# Altium PCB Zoom Camrea Controller V3.0.PcbDoc
Units mil, origin at the board's own origin, x right, y up, seen from the top; angles counter-clockwise.
Board outline 1500 x 1500 mil, 2 copper layers (Top Layer, Bottom Layer); 20 components, 31 nets, 121 pads, 44 vias.
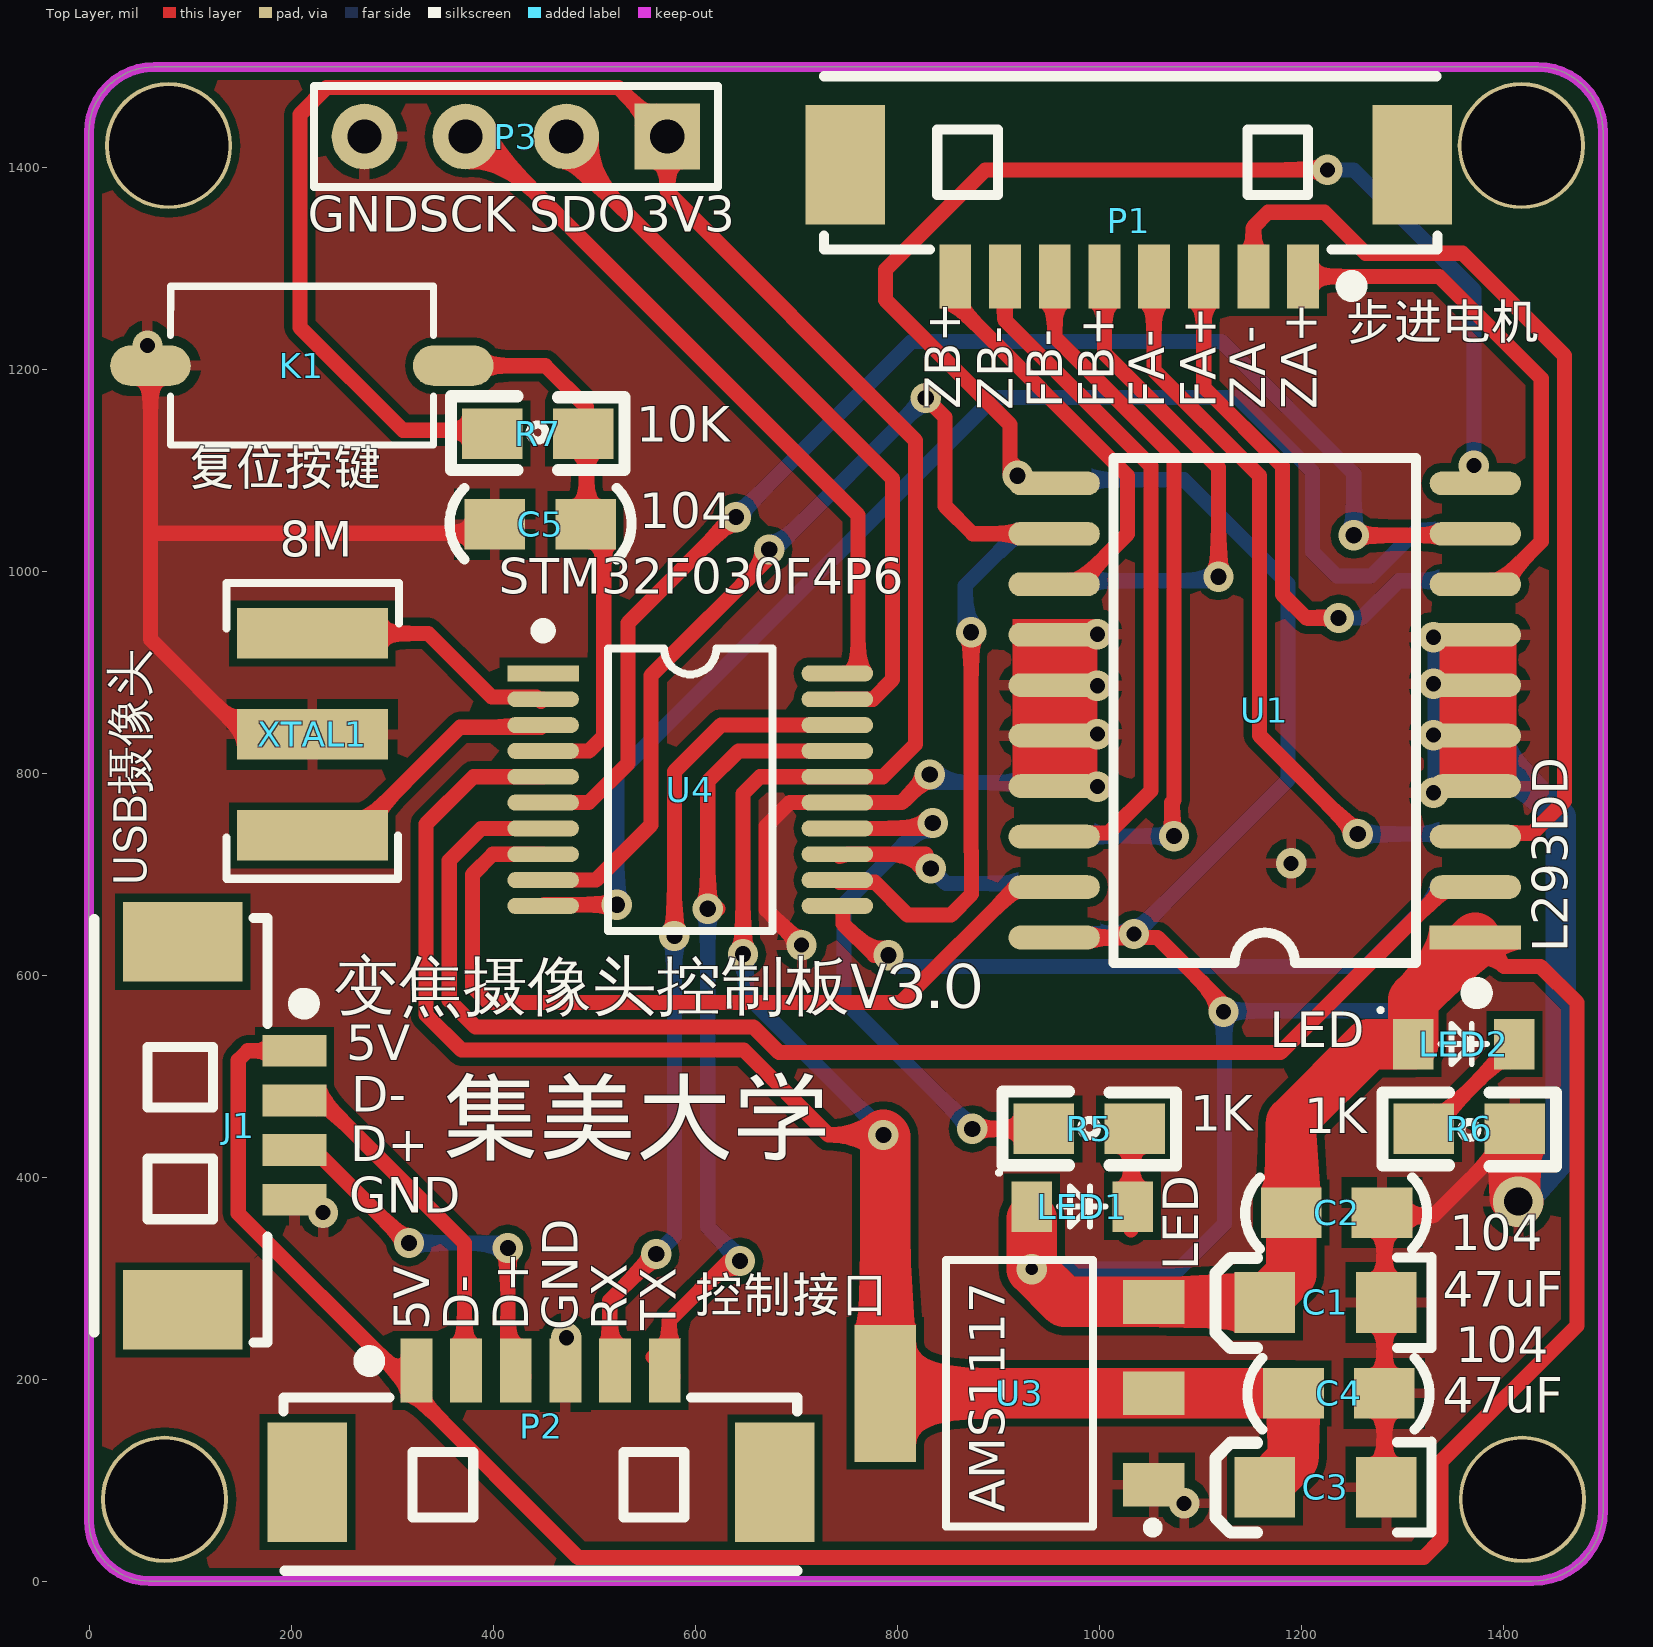
[diagram p0: Top Layer view]
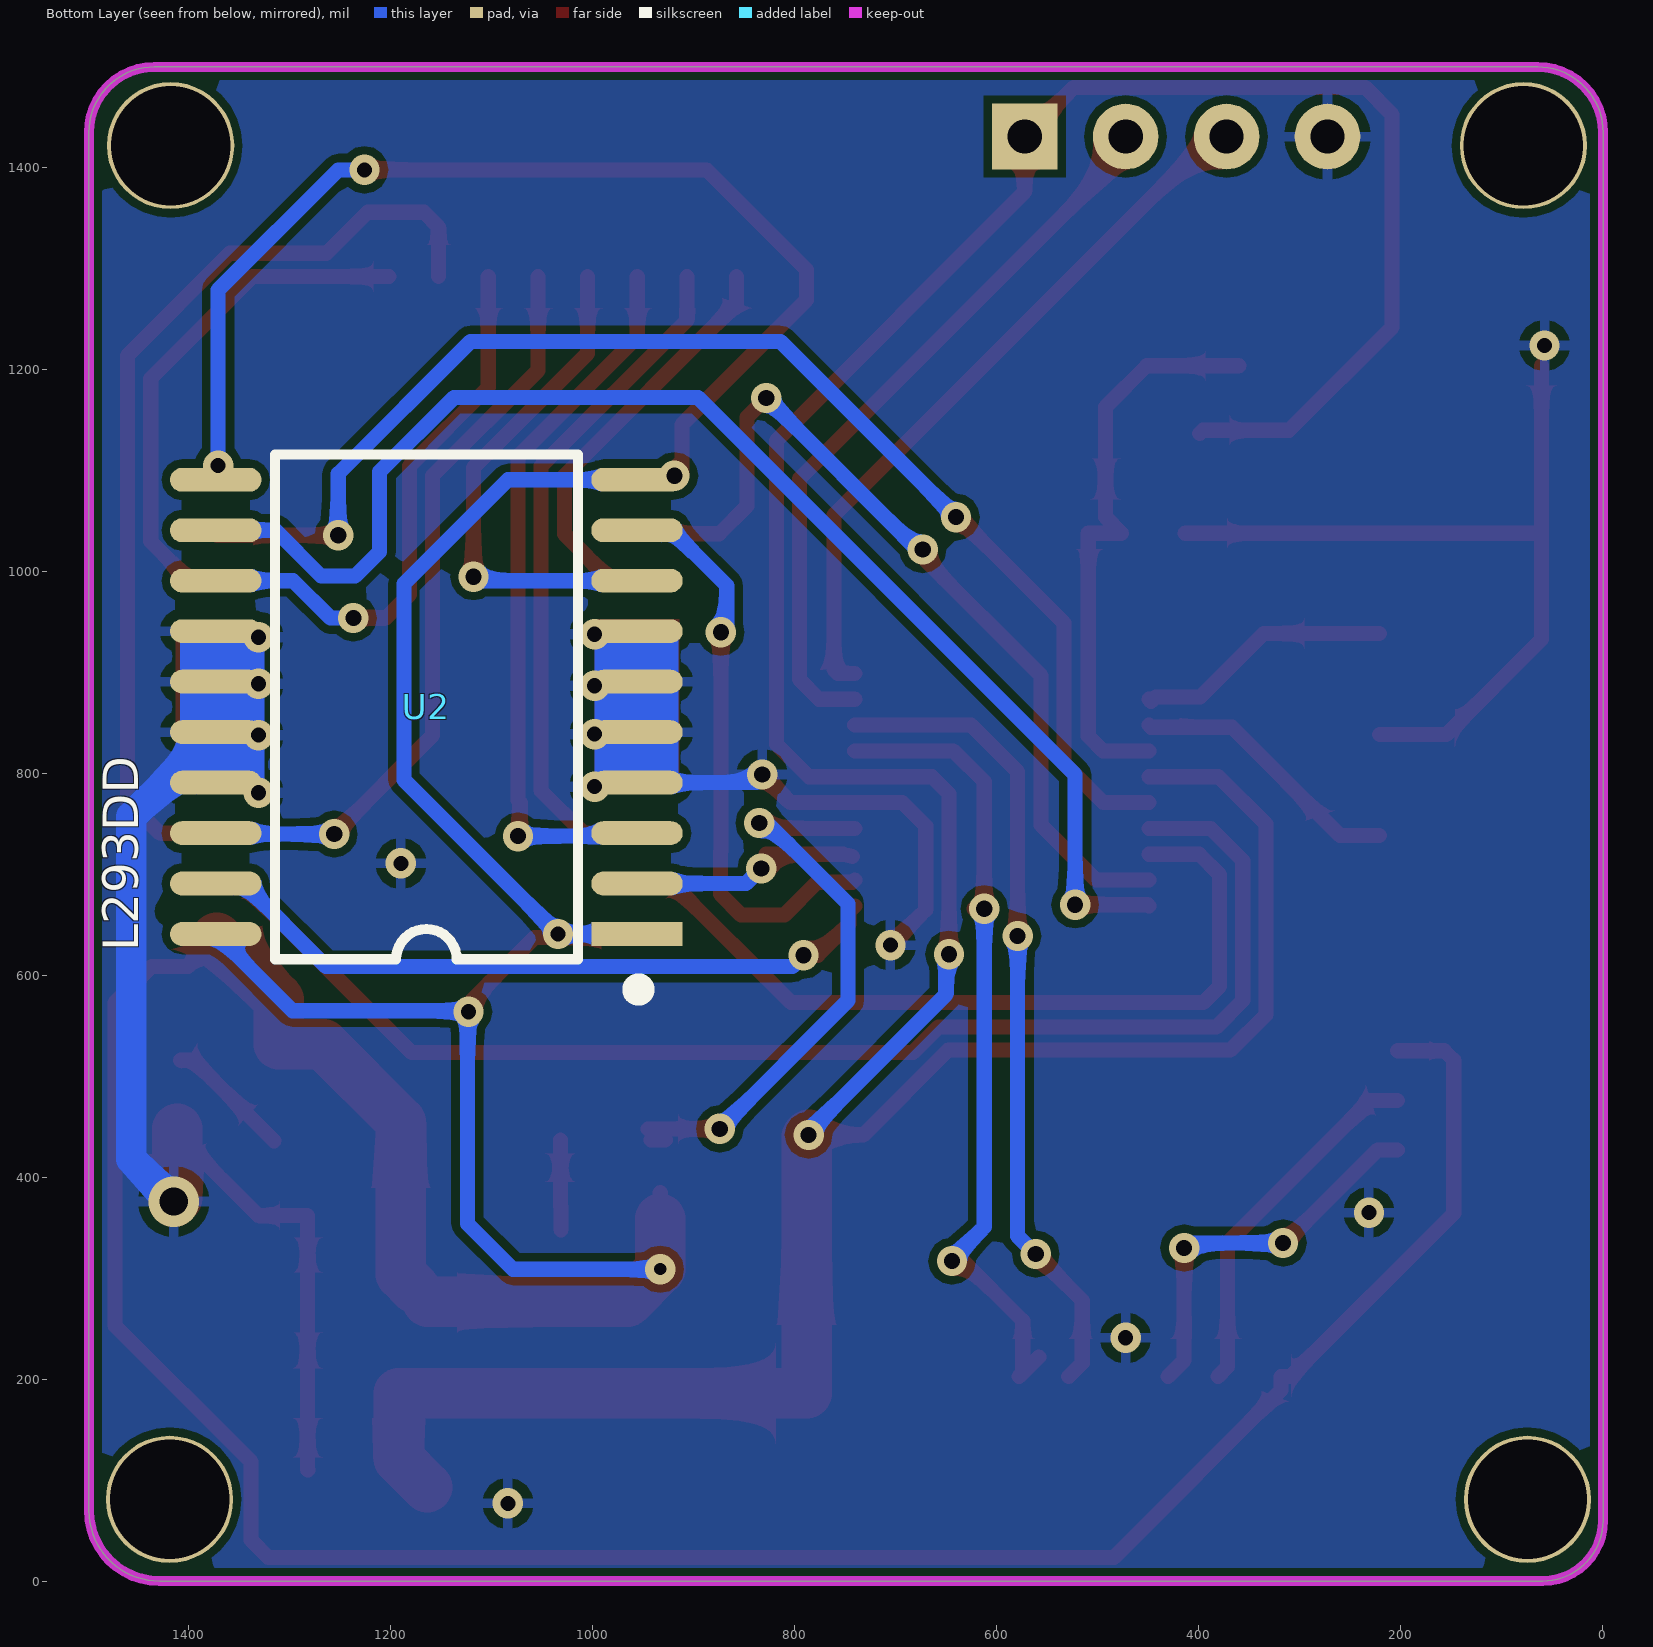
[diagram p1: Bottom Layer view, seen from below]
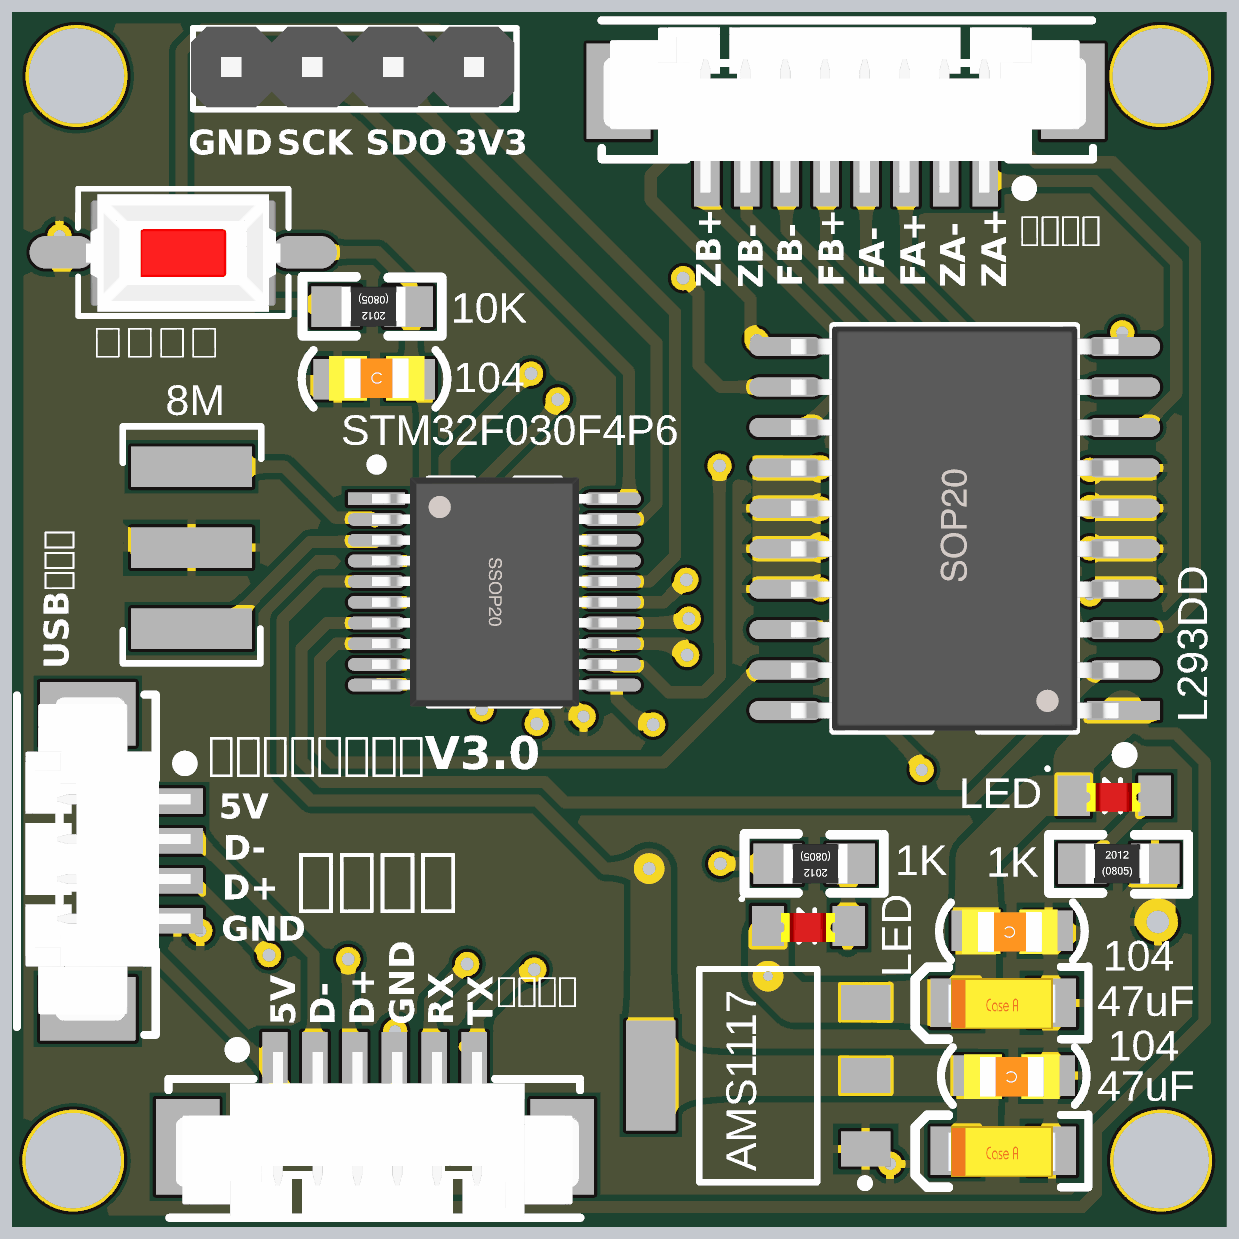
[diagram p2: 3D render of the assembled board from above, using the file's embedded part models]

## Layer stack, top to bottom
Top Solder: solder mask 0.4, Solder Resist, Dk 3.5
Top Layer: signal copper 1.4
Dielectric 1: dielectric 12.6, FR-4, Dk 4.8
Bottom Layer: signal copper 1.4
Bottom Solder: solder mask 0.4, Solder Resist, Dk 3.5

## Board outline
59,0 cw(c59,60) -1,60 -1,1435 cw(c64,1435) 64,1500 1434,1500 cw(c1434,1435) 1499,1435 1499,70 cw(c1429,70) 1429,0

## Design rules (kind name [scope] priority, off if disabled: settings)
Clearance [All] p1: gap=8
PolygonConnect [All] p1: connectstyle=Relief reliefconductorwidth=10 reliefentries=4 polygonreliefangle="90 Angle" airgapwidth=10
RoutingVias [All] p1: holewidth=28 width=50 viastyle="Through Hole" minholewidth=28 minwidth=50 maxholewidth=28 maxwidth=50
SolderMaskExpansion [All] p1: expansion=4
Width [All] p1: maxlimit=50 minlimit=15 preferedwidth=15 minimp=50.000000 maximp=50.000000 favimp=50.000000
30 further rules are at their usual default settings.

## Components (designator, comment, footprint, x,y, rotation, side; value= is the part's Value field where it differs from the comment)
C1 "47uF" TAJ-A 1164,276 r180 top
C2 "104" 0805C 1275,365 r180 top
C3 "47uF" TAJ-A 1164,93 r180 top
C4 "104" 0805C 1277.31,186 r180 top
C5 "104" 0805C 406,1047 r0 top
J1 "" MX1.25WS-4P 92,451 r270 top
K1 "复位按键" 贴片按键 354.29,1206.8 r180 top
LED1 "LED" 0805LED(RED) 936,376 r0 top
LED2 "LED" 0805LED(RED) 1314,537 r0 top
P1 "" MX1.25WS-8P 1029,1403 r180 top
P2 "" MX1.25WS-6P 447,98 r0 top
P3 "" "Header 4" 572.93,1431.95 r270 top
R5 "1K" 0805R 1030.49,449.2 r180 top
R6 "1K" 0805R 1326,446.72 r0 top
R7 "10K" 0805R 484,1138 r180 top
U1 "L293DD" SOP-20 1158.5,837.5 r180 top
U2 "L293DD" SOP-20 1170,841 r0 bottom
U3 "AMS1117" SOT-223 1054.87,99 r90 top
U4 "STM32F030F4P6" STM32F030 453.67,899.02 r0 top
XTAL1 "8M" 三脚贴片8M晶振 218,939 r0 top

## Footprints (in the part's own frame and the unit in brackets; to place one, negate y for a bottom-side part, rotate by r counter-clockwise, add the part's x,y. Pads: shape width x height; smd on the part's side, far side on the other; paste and mask are expansions set on the pad)
0805C [mil]
  rect 60x50 smd: 1(-5,0) 2(85,0)
  silkscreen extent -50,-35 131,36, body extent -16,-26 102,29, height 37
0805LED(RED) [mil]
  rect 40x50 smd: 1(-2.98,-4.95) 2(97.02,-4.95)
  silkscreen extent -37,-25 70,31, body extent 13,-25 80,11, height 35
0805R [mil]
  rect 60x50 smd: 1(-4.51,1.2) 2(85.49,1.2)
  silkscreen extent -46,-36 126,37, body extent -1,-23 78,26, height 18
"Header 4" [mil]
  rect 65x65 hole 34: 1(0.95,-0.93)
  round 65 hole 34: 2(0.95,-100.93) 3(0.95,-200.93) 4(0.95,-300.93)
  silkscreen extent -49,-351 51,49, body extent -51,-354 49,46, height 336
MX1.25WS-4P [mm]
  rect 2x3 smd: 0(-4.632,0) 0(4.632,0)
  rect 0.8x1.6 smd: 1(-1.889,2.811) 2(-0.639,2.811) 3(0.611,2.811) 4(1.861,2.811)
  silkscreen extent -5.23,-2.23 5.45,3.25, body extent -5.15,-1.96 5,3.23, height 3.4
MX1.25WS-6P [mm]
  rect 2x3 smd: 0(-5.882,0) 0(5.882,0)
  rect 0.8x1.6 smd: 1(-3.139,2.811) 2(-1.889,2.811) 3(-0.639,2.811) 4(0.611,2.811) 5(1.861,2.811) 6(3.111,2.811)
  silkscreen extent -6.48,-2.23 6.45,3.25, body extent -6.25,-2.21 6.4,2.98, height 3.4
MX1.25WS-8P [mm]
  rect 2x3 smd: 0(-7.132,0) 0(7.132,0)
  rect 0.8x1.6 smd: 1(-4.389,2.811) 2(-3.139,2.811) 3(-1.889,2.811) 4(-0.639,2.811) 5(0.611,2.811) 6(1.861,2.811) 7(3.111,2.811) 8(4.361,2.811)
  silkscreen extent -7.77,-2.23 7.67,3.25, body extent -7.55,-2.01 7.6,3.18, height 3.4
SOP-20 [mm]
  rect 2.3x0.6 smd: 1(-5.436,5.08)
  oval 2.3x0.6 smd: 2(-5.436,3.81) 3(-5.436,2.54) 4(-5.436,1.27) 5(-5.436,0) 6(-5.436,-1.27) 7(-5.436,-2.54) 8(-5.436,-3.81) 9(-5.436,-5.08) 10(-5.436,-6.35) 11(5.164,-6.35) 12(5.164,-5.08) 13(5.164,-3.81) 14(5.164,-2.54) 15(5.164,-1.27) 16(5.164,0) 17(5.164,1.27) 18(5.164,2.54) 19(5.164,3.81) 20(5.164,5.08)
  silkscreen extent -5.62,-6.98 3.67,6.63, body extent -5.29,-6.98 5.02,5.72, height 2.7
SOT-223 [mm]
  rect 1.1x1.55 smd: 1(-0.09,0.029) 2(2.21,0.029) 3(4.51,0.029)
  rect 3.45x1.55 smd: 4(2.21,6.779)
  silkscreen extent -1.29,-0.07 5.56,5.25, body extent -1.09,-0.53 5.51,6.83, height 0.8
STM32F030 [mm]
  rect 1.8x0.4 smd: 1(-0.119,0.004)
  oval 1.8x0.4 smd: 2(-0.119,-0.646) 3(-0.119,-1.296) 4(-0.119,-1.946) 5(-0.119,-2.596) 6(-0.119,-3.246) 7(-0.119,-3.896) 8(-0.119,-4.546) 9(-0.119,-5.196) 10(-0.119,-5.846) 11(7.281,-5.846) 12(7.281,-5.196) 13(7.281,-4.546) 14(7.281,-3.896) 15(7.281,-3.246) 16(7.281,-2.596) 17(7.281,-1.946) 18(7.281,-1.296) 19(7.281,-0.646) 20(7.281,0.004)
  silkscreen extent -0.25,-6.48 5.65,1.21, body extent -0.27,-6.52 7.43,0.68, height 1.65
TAJ-A [mil]
  rect 60x60 smd: 1(0,0) 2(-120,0)
  silkscreen extent -165,-45 49,45, body extent -125,-31 9,32, height 65
三脚贴片8M晶振 [mm] "CSTCC8M00G53-RO"
  rect 3.8x1.27 smd: 1(0.06,-0.006) 2(0.06,-5.086) 3(0.06,-2.546)
  silkscreen extent -2.1,-6.18 2.24,1.26, body extent -1.72,-6.23 1.84,1.26, height 1.5
贴片按键 [mil]
  oval 80x40 smd: 1(-5.71,2.8) 2(294.29,2.8)
  silkscreen extent 14,-76 274,82, body extent 24,-69 264,77, height 98

## Part data
C1 C3: library part "Pol Cap", "极性贴片电容"
C2 C4 C5: library part Cap1, "无极贴片电容"
J1: library part MX1.25-4P
K1: library part 贴片按键, "轻触开关"
LED1 LED2: "发光二极管"
P1: library part MX1.25-8P
P2: library part MX1.25-6P
P3: library part "Header 4", "Header, 4-Pin"
R5 R6 R7: library part Res, "电阻"
U1 U2: library part L293D
U3: library part AMS1117-3.3V/5.0V, "电源芯片"
U4: "ARM Cortex-M0 32-bit MCU, 16 KB Flash, 4 KB Internal RAM, 15 I/Os, 20-pin TSSOP, -40 to 85 degC, Tube"
XTAL1: library part XTAL三脚贴片晶振

## Free pads (board coordinates)
  round 125.98 hole 118.11: 2(74,81) 2(78,1422) 2(1418,1422) 2(1419,81)

## Via types
v1: diameter 30, hole 16, Top Layer to Bottom Layer, 24 vias
v2: diameter 30, hole 15, Top Layer to Bottom Layer, 18 vias
v3: diameter 30, hole 12, Top Layer to Bottom Layer, 1 vias
v4: diameter 50, hole 28, Top Layer to Bottom Layer, 1 vias

## Nets (pads, with @x,y where several pads share a name; then routed paths per layer and width w, separated by ;. In a path a pad name is that pad's centre, name@x,y a point inside that pad or via, vN(x,y) a via of type N, cw(c..) or ccw(c..) an arc to the next point about the centre after c; other vN are vias at no path point)
3.3V: C3.1 C4.2 P3.1 R7.2 U3.2 U3.4 U4.5 U4.16 | length 3723.5
  Top Layer w15: R7.2 395.31,1140 310,1140 208,1242 208,1453 234.5,1479.5 523.5,1479.5 P3.1 572,1376 818,1130 818,829 785.82,796.82 U4.16 663.82,796.82 647,780 v1(647,621) ; U4.5 379.82,796.82 333,750 333,561 368,526 647.67,526 731.67,442 v1(786,442)
  Top Layer w50: v1(786,442) 788,440 U3.4 U3.2 C4.2 1192.31,121.31 C3.1
  Bottom Layer w15: v1(647,621) 650,618 650,581 786,445 v1(786,442)
5.0V: C1.1 C2.2 J1.1 LED1.1 LED2.1 P2.1 U1.1 U1.10 U1.11 U1.20 U2.1 U2.10 U2.11 U2.20 U3.3 | length 5957.6
  Top Layer w15: J1.1 156.36,525.36 147,516 147,364.21 308.56,202.65 318,202.65 318,189 483.56,23.44 1321.37,23.44 1338.5,40.58 1338.5,118.5 1473,253 1473,573 1437,609 1401,609 U1.1 ; v1@911.33,1096.44 911.33,1109.67 ; LED1.1@933.02,359 LED1.1 LED1.1@933.02,384.98 ; U1.20 1057.5,637.5 1123,572 v2(1123,564) ; U1.11 933.5,1087.5 911.33,1109.67 ; C1.1@1163.45,276.55 C1.1 ; v2(1226,1398) 887,1398 788,1299 788,1269 911.33,1145.67 911.33,1109.67
  Top Layer w50: LED1.1@933.02,359 v3(933.02,308.98) 965.45,276.55 U3.3 C1.1@1163.45,276.55 ; C1.1@1176,290 1190,304 C2.2 1190,455 1267.05,532.05 LED2.1 1311.02,576.02 U1.1
  Bottom Layer w15: v1(919,1095) 923,1091 U2.10 1084,1091 1187,988 1187,793.72 v2(1034.28,641) U2.1 ; v3(933.02,308.98) 1078.98,308.98 1124,354 v2@1124,562 ; v2@1121,565 1297.32,565 U2.20 ; v2(1226,1398) 1252,1398 1371,1279 1371,1156 1371,1093.32 U2.11 U2.11@1407,1091
  other v2: 1371,1105
B1: R5.2 U4.14 | length 578.6
  Top Layer w15: U4.14 829.64,745.64 v1(835,751) ; v1(874,448) R5.2 ; R5.2@928,437 R5.2@942,437
  Bottom Layer w15: v1(835,751) 827,751 747,671 747,575 v1(874,448)
"CAMERA USB_D+": J1.3 P2.3 | length 395.4
  Top Layer w15: J1.3 222.61,426.94 314.54,335 v1(316,335) ; v1(414,330) 414,218.5 P2.3@429.85,202.65
  Bottom Layer w15: v1(316,335) 419,335 v1(414,330)
"CAMERA USB_D-": J1.2 P2.2 | length 363.2
  Top Layer w15: J1.2 229.85,476.15 371,335 371,212.29 P2.2@380.64,202.65
FOCUS_A+: P1.3 U2.13 | length 564.1
  Top Layer w15: P1.3 1103.36,1182.69 1181.5,1104.55 1181.5,977.5 1205,954 v1(1237,954)
  Bottom Layer w15: v1(1237,954) 1259.8,954 1296.8,991 U2.13
FOCUS_A-: P1.4 U2.18 | length 753.7
  Top Layer w15: P1.4 1054.15,1199.38 1158.5,1095.03 1158.5,837.5 v1(1256,740)
  Bottom Layer w15: v1(1256,740) 1372.32,740 U2.18
FOCUS_B+: P1.5 U2.8 | length 507.8
  Top Layer w15: P1.5 1004.94,1216.06 1118,1103 v1(1118,995)
  Bottom Layer w15: U2.8 1114,991 v1(1118,995)
FOCUS_B-: P1.6 U2.3 | length 714.2
  Top Layer w15: P1.6 955.72,1232.33 1074,1114.05 1074,773.47 1071.76,771.24 1072,771 1072,732 1074,734 v1(1074,738)
  Bottom Layer w15: U2.3@977,738 v1(1074,738)
GND: C1.2 C2.1 C3.2 C4.1 C5.1 J1.4 K1.2 P2.4 P3.4 R6.2 U1.4 U1.5 U1.6 U1.7 U1.14 U1.15 U1.16 U1.17 U2.4 U2.5 U2.6 U2.7 U2.14 U2.15 U2.16 U2.17 U3.1 U4.15 XTAL1.3 | length 2265.7
  Top Layer w15: K1.2 60,1034 ; XTAL1.3 154.24,838.76 60,933 60,1034 ; C5.1@413,1038 64,1038 60,1034 ; v2(705,630) 670,665 670,748 693.23,771.23 U4.15 804.23,771.23 v1(832,799) ; C3.2@1282,110 1282.31,110.31 C4.1 1282.31,362 1331.28,362 R6.2@1405.49,436.2
  Top Layer w50: R6.2 1411.49,379.51 v4(1415,376)
  Bottom Layer w15: v1(832,799) ccw(c840,799) 840,791 U2.4
  Bottom Layer w30: U2.16 1457,757.32 1457,418 v4(1415,376)
  other v2: 1084,77 472,241 231,365 1190,711 1331,781 998,787 1331,838 998,839 998,887 1331,889 1331,935 998,938 57,1224
IN1: U1.9 U4.6 | length 1316
  Top Layer w15: U4.6 494.23,771.23 533,810 533,949 638,1054 v1(640,1054) ; v1(1252,1036) 1371.82,1036 1374.82,1039 1374.91,1038.91 U1.9@1377,1041
  Bottom Layer w15: v1(640,1054) 814,1228 1121,1228 1252,1097 v1(1252,1036)
IN2: U1.2 U4.7 | length 1356.8
  Top Layer w15: U4.7 387.64,745.64 356,714 356,575 382,549 657.2,549 682.7,523.5 1179.49,523.5 1311.72,655.73 1320.8,664.81 1346.99,691 U1.2@1377,691
IN3: U1.19 U4.8 | length 825.5
  Top Layer w15: U4.8 399.05,720.05 379,700 379,589 395,573 803.59,573 921.59,691 U1.19@959.68,691
IN4: U1.12 U4.9 | length 907.1
  Top Layer w15: U4.9 501.46,694.46 556,749 556,897 673,1014 v1(673,1022) ; v1(828,1172) 847,1153 847,1065 874.5,1037.5 889.31,1037.5 U1.12 ; U1.12@955.18,1041 U1.12@959.68,1041
  Bottom Layer w15: v1(673,1022) 678,1022 v1(828,1172)
IN5: U2.12 U4.10 | length 1347.1
  Top Layer w15: U4.10 450.13,670 v1(522,670)
  Bottom Layer w15: v1(522,670) 522,799 895.5,1172.5 1137.5,1172.5 1211,1099 1211,1019.72 1235.22,995.5 1268.78,995.5 1314.28,1041 U2.12
IN6: U2.19 U4.11 | length 698.9
  Top Layer w15: U4.11 746,663.2 746,651 777,620 v1(791,620)
  Bottom Layer w15: v1(791,620) 802,609 1264,609 1346,691 U2.19
IN7: U2.9 U4.12 | length 575.9
  Top Layer w15: U4.12 742.56,692.24 777.58,692.24 809.82,660 853,660 873.5,680.5 873.5,722.78 873,723.28 v1(873,940)
  Bottom Layer w15: v1(873,940) 867,946 867,986 922,1041 U2.9
IN8: U2.2 U4.13 | length 215
  Top Layer w15: U4.13@742.56,717.83 751.34,720.05 v1@828.05,720.05
  Bottom Layer w15: v1(833,706) 848,691 U2.2
NetLED1_2: LED1.2 R5.1 | length 89.2
  Top Layer w15: LED1.2@1031.39,348.05 1031.39,371.05 1032,371.66 R5.1@1032,437
NetLED2_2: LED2.2 R6.1 | length 125.6
  Top Layer w15: R6.1@1315.49,436.2 1395.28,516 LED2.2@1408,516
NRST: C5.2 K1.1 R7.1 U4.4 | length 580.7
  Top Layer w15: K1.1 451,1204 492,1163 492,1054 476,1038 509,1038 509,837 494.41,822.41 U4.4
STM32F0_PF0: U4.2 XTAL1.1 | length 257.5
  Top Layer w15: XTAL1.1 335.11,938.76 398.07,875.81 442.35,875.81 446.78,871.37 U4.2
STM32F0_PF1: U4.3 XTAL1.2 | length 273.9
  Top Layer w15: XTAL1.2 259.76,738.76 366.78,845.78 446.78,845.78 U4.3
STM32F0_RX: P2.5 U4.18 | length 811.7
  Top Layer w15: P2.5@528.28,202.65 515,215.93 515,278 v1(561,324) ; v1(579,639) 579,802 625,848 U4.18
  Bottom Layer w15: v1(561,324) 579,342 v1(579,639)
STM32F0_TX: P2.6 U4.17 | length 831.5
  Top Layer w15: P2.6@577.49,202.65 P2.6@570.49,209.65 ; v1@622,666 v1(612,666) 612,792 642.41,822.41 U4.17 ; v1(644,317) 633,317 573.93,257.93 573.93,209.65 P2.6@570.49,209.65 ; P2.6@570.49,209.65 558,222.14 P2.6@570.49,209.65
  Bottom Layer w15: v1(612,666) 612,351 645,318 v1(644,317)
SWCLK: P3.3 U4.20 | length 719.6
  Top Layer w15: P3.3 381,1422 395,1422 761,1056 761,903 757.18,899.18 U4.20
SWDIO: P3.2 U4.19 | length 734.5
  Top Layer w15: P3.2 472,1415 795,1092 795,893 775.59,873.59 U4.19
ZOOM_A+: P1.1 U1.8 | length 516.2
  Top Layer w15: P1.1 1336.65,1292.35 1437.78,1191.22 1437.78,1029.69 1399.09,991 U1.8@1377,991
ZOOM_A-: P1.2 U1.3 | length 982.6
  Top Layer w15: P1.2 1152.57,1341.57 1167,1356 1223,1356 1263.65,1315.35 1359.65,1315.35 1460.78,1214.22 1460.78,772.78 1429,741 U1.3@1354.91,741
ZOOM_B+: P1.8 U1.13 | length 435.4
  Top Layer w15: P1.8 857.3,1265.7 1028,1095 1028,1037.23 981.77,991 U1.13@937.59,991
ZOOM_B-: P1.7 U1.18 | length 677.9
  Top Layer w15: P1.7 906.51,1249.02 1051,1104.53 1051,783 1009,741 U1.18@959.68,741
pads on no net: J1.0 P1.0 P2.0 U4.1

## Polygon pours and split planes (outlines as drawn)
GND on Bottom Layer "Top Layer-No Net" (solid, remove dead copper, pour order 42): -134,1272 -134,1511 cw(c-34,1511) -34,1611 41,1611 1495,1611 cw(c1495,1511) 1595,1511 1595,1272 1595,18 cw(c1498,18) 1498,-79 -29,-79 cw(c-29,21) -129,21 -129,49
GND on Top Layer "Top Layer-No Net" (solid, remove dead copper, pour order 44): -100,1252 -100,1480 cw(c0,1480) 0,1580 13,1580 1493,1580 cw(c1493,1480) 1593,1480 1593,1293 1593,18 cw(c1493,18) 1493,-82 1364,-82 5,-82 cw(c5,18) -95,18 -95,77

## Keep-outs
Keep-Out Layer:
  the board outline again, w10

## Other copper
Top Layer:
  rectangle net GND: 914,787 998,953
  rectangle net GND: 1337,782 1413,945
Bottom Layer:
  rectangle net GND: 1325,784 1409,948
  rectangle net GND: 915,787 998,948

## Silkscreen, mask and mechanical layers (free items; w line width, h text height)
Top Overlay:
  text "GND" at 216,1325 h60
  text "SCK" at 325.67,1325 h60
  text "SDO" at 435.33,1325 h60
  text "3V3" at 545,1325 h60
  text "步进电机" at 1244,1219 h60
  text "FB-" at 975.28,1161.67 h60 r90
  text "FB+" at 1026.28,1161.67 h60 r90
  text "FA-" at 1076.28,1161.67 h60 r90
  text "FA+" at 1127.28,1161.67 h60 r90
  text "ZB+" at 874.28,1160.67 h60 r90
  text "ZA-" at 1176.28,1160.67 h60 r90
  text "ZA+" at 1227.28,1160.67 h60 r90
  text "ZB-" at 926.28,1159.67 h60 r90
  text "USB摄像头" at 68,689 h60 r90
  text "变焦摄像头控制板V3.0" at 242,552 h80
  text "5V" at 254,504 h60
  text "D-" at 259,453 h60
  text "D+" at 258,404 h60
  text "集美大学" at 349,402 h120
  text "GND" at 257,353 h60
  text "控制接口" at 599,255 h60
  text "5V" at 348.28,248.73 h60 r90
  text "D-" at 397.08,248.67 h60 r90
  text "D+" at 445.88,248.67 h60 r90
  text "GND" at 495.12,248.67 h60 r90
  text "RX" at 543.48,248.67 h60 r90
  text "TX" at 592.28,248.67 h60 r90